# Altium PCB JacdacEc30Template20x20 80.PcbDoc
Units mm, origin at the board's own origin, x right, y up, seen from the top; angles counter-clockwise.
Board outline 28 x 25 mm, 2 copper layers (Top Layer, Bottom Layer), stack 1.525 mm thick; 8 components, 3 nets, 32 pads, 2 vias.
Unrouted connection lines stored in the file: 11.
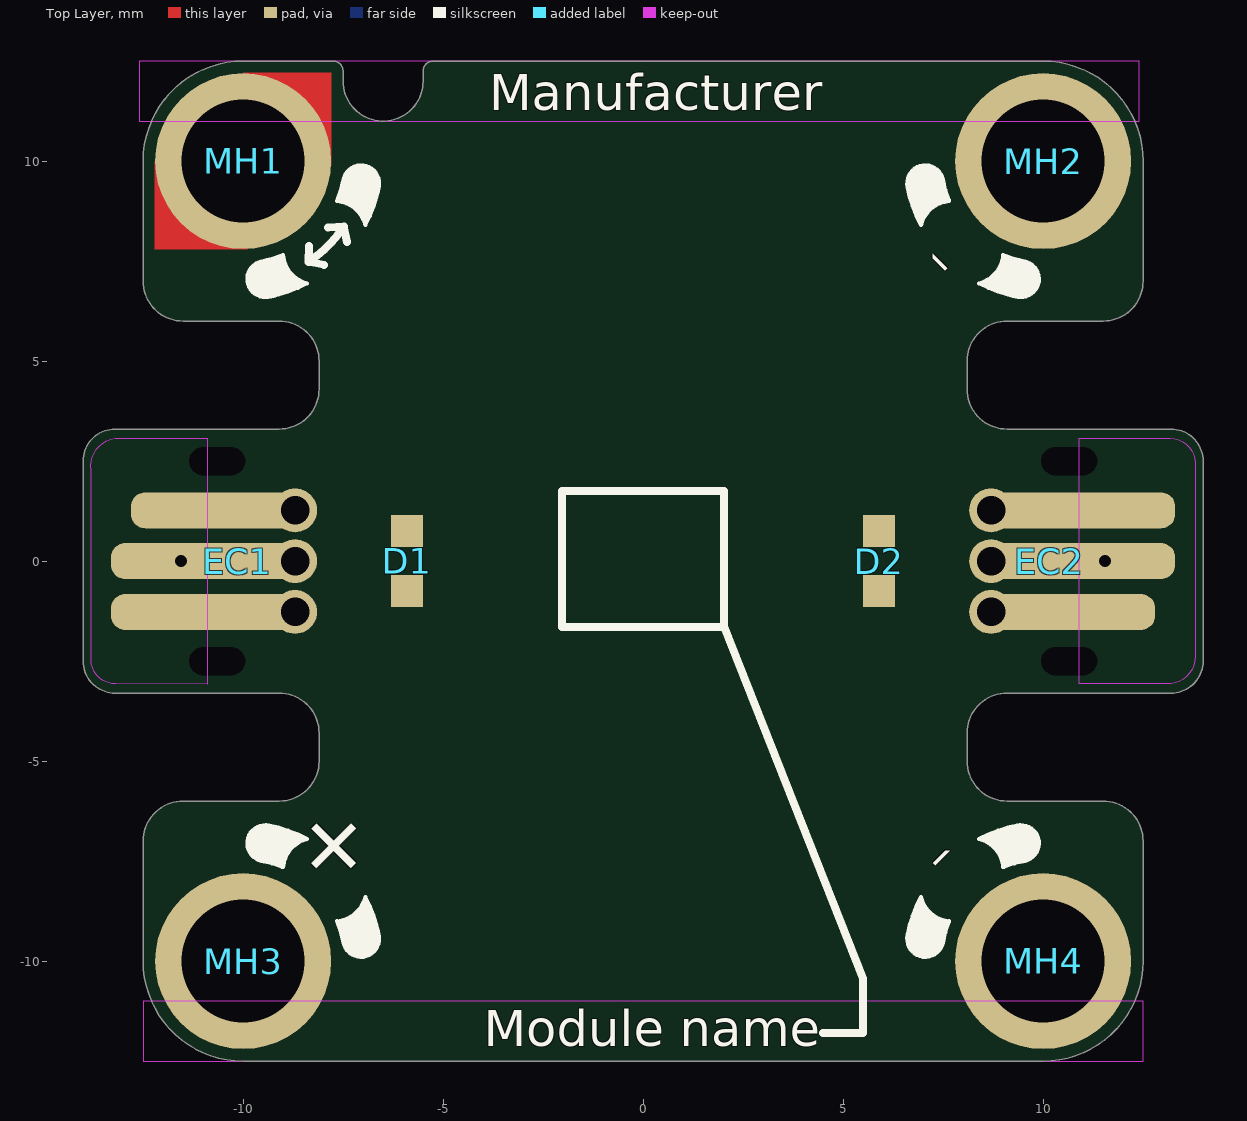
[diagram p0: Top Layer view]
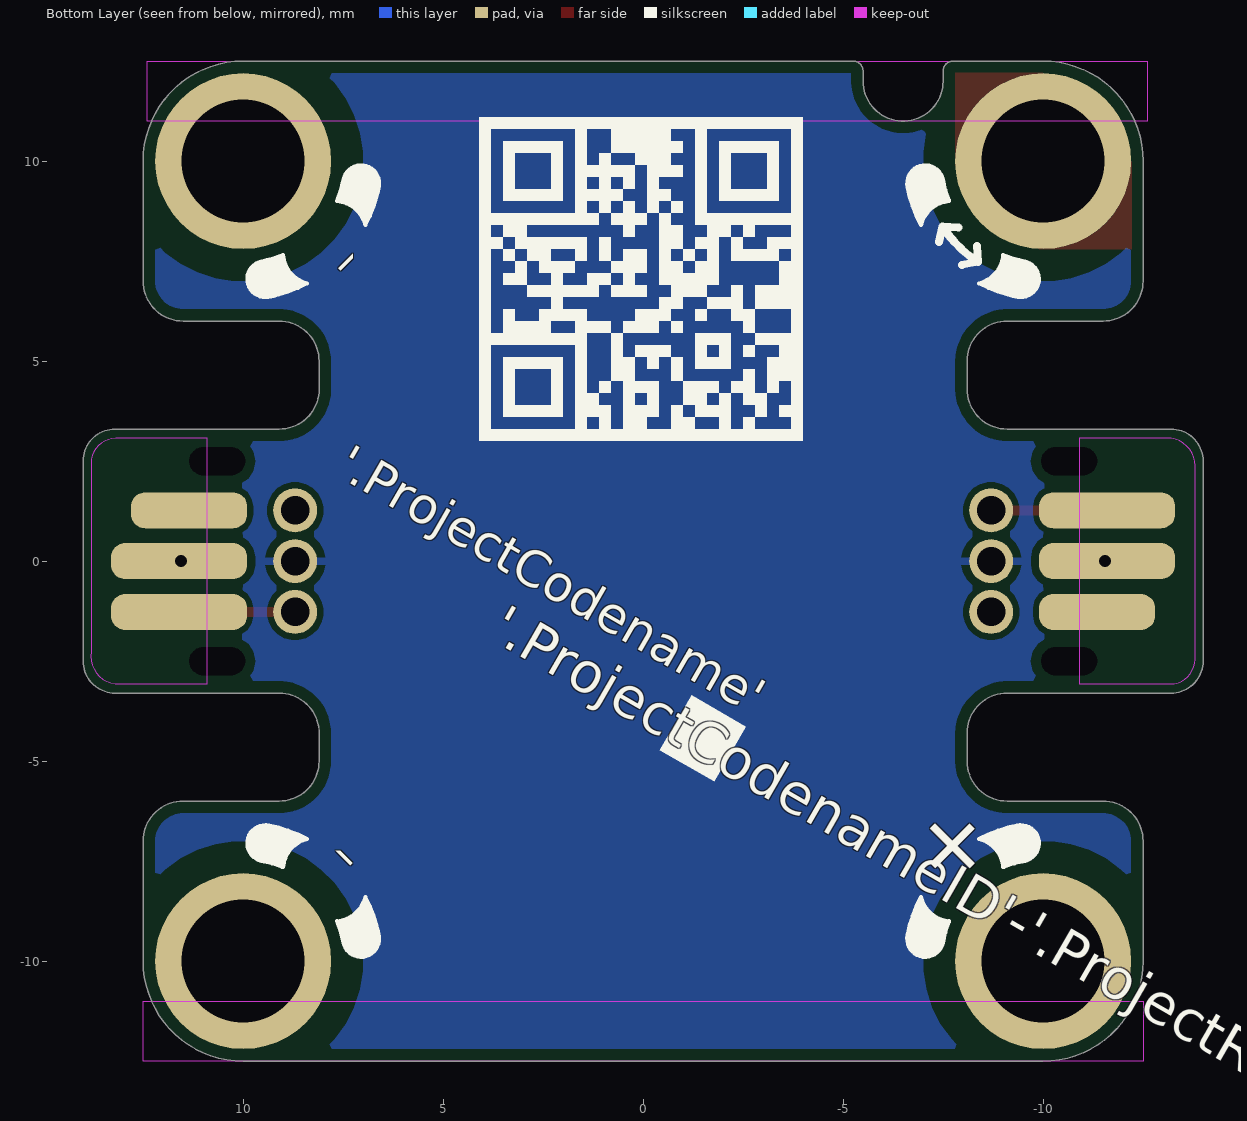
[diagram p1: Bottom Layer view, seen from below]

## Layer stack, top to bottom
Top Solder: solder mask 0.0102, Solder Resist, Dk 3.5
Top Layer: signal copper 0.0356
Dielectric 1: core 1.454, FR-4, Dk 4.2
Bottom Layer: signal copper 0.0356
Bottom Solder: solder mask 0.0102, Solder Resist, Dk 3.5

## Board outline
-12.5,-10 ccw(c-10,-10) -10,-12.5 10,-12.5 ccw(c10,-10) 12.5,-10 12.5,-7 ccw(c11.5,-7) 11.5,-6 9.1,-6 cw(c9.1,-5) 8.1,-5 8.1,-4.3 cw(c9.1,-4.3) 9.1,-3.3 13.2,-3.3 ccw(c13.2,-2.5) 14,-2.5 14,2.5 ccw(c13.2,2.5) 13.2,3.3 9.1,3.3 9.098,3.3 cw(c9.098,4.3) 8.098,4.3 8.1,4.3 8.1,5 cw(c9.1,5) 9.1,6 11.5,6 ccw(c11.5,7) 12.5,7 12.5,10 ccw(c10,10) 10,12.5 -5.25,12.5 ccw(c-5.25,12.25) -5.5,12.25 -5.5,12 cw(c-6.5,12) -7.5,12 -7.5,12.25 ccw(c-7.75,12.25) -7.75,12.5 -10,12.5 ccw(c-10,10) -12.5,10 -12.5,6.97 -12.5,7 ccw(c-11.5,7) -11.5,6 -9.1,6 cw(c-9.1,5) -8.1,5 -8.1,4.3 cw(c-9.1,4.3) -9.1,3.3 -13.2,3.3 ccw(c-13.2,2.5) -14,2.5 -14,2.47 -14,-2.47 -14,-2.5 ccw(c-13.2,-2.5) -13.2,-3.3 -9.1,-3.3 cw(c-9.1,-4.3) -8.1,-4.3 -8.1,-5 cw(c-9.1,-5) -9.1,-6 -11.5,-6 ccw(c-11.5,-7) -12.5,-7 -12.5,-6.97

## Design rules (kind name [scope] priority, off if disabled: settings)
AssemblyTestPointUsage [All] p1: valid=2
BoardOutlineClearance [not (HasFootprint('MOUSEBITE_CONNECTOR_3X2') or HasFootprint('MOUSEBITE_NOCONNECTOR_3'))] p1: gap=0.3 ignorepadtopadclearanceinfootprint=FALSE except(0: Arc-SplitContinuation Track-SplitContinuation SMDPad-SplitContinuation THPad-SplitContinuation Via-SplitContinuation Fill-SplitContinuation Poly-SplitContinuation Text-OutlineEdge Text-CavityEdge Text-CutoutEdge Text-SplitBarrior Text-SplitContinuation; 0.15: Region-OutlineEdge Region-CavityEdge Region-CutoutEdge Region-SplitBarrior Region-SplitContinuation)
Clearance "Clearance MH" [InComponent('MH1') OR InComponent('MH2') OR InComponent('MH3') OR InComponent('MH4')] p1: gap=0.15 ignorepadtopadclearanceinfootprint=FALSE except(0.254: Arc-Hole Track-Hole SMDPad-Hole THPad-Hole Via-Hole Fill-Hole Poly-Hole Region-Hole Text-Hole; 0.8: Arc-Fill Arc-Poly Arc-Region Track-Fill Track-Poly Track-Region SMDPad-Fill SMDPad-Poly SMDPad-Region THPad-Fill THPad-Poly THPad-Region Via-Fill Via-Poly Via-Region Fill-Fill Fill-Poly Fill-Region Poly-Poly Poly-Region Region-Region)
Clearance [All] p2: gap=0.15 ignorepadtopadclearanceinfootprint=FALSE except(0.254: Arc-Hole Track-Hole SMDPad-Hole THPad-Hole Via-Hole Fill-Hole Poly-Hole Region-Hole Text-Hole)
ComponentClearance [All] p1: gap=0.01 collisioncheckmode=3 verticalgap=0.2 showdistances=FALSE
DiffPairsRouting [All] p1: maxlimit=2 minlimit=0.15 mostfreqgap=0.15 toplayer_minwidth=0.15 toplayer_maxwidth=2 toplayer_prefwidth=0.15 bottomlayer_minwidth=0.15 bottomlayer_maxwidth=2 bottomlayer_prefwidth=0.15 substack1={CB9D278B-8BF5-444A-AAF4-837A2A9DF42D} toplayer_{cb9d278b-8bf5-444a-aaf4-837a2a9df42d}_minwidth=0.381 toplayer_{cb9d278b-8bf5-444a-aaf4-837a2a9df42d}_maxwidth=0.381 toplayer_{cb9d278b-8bf5-444a-aaf4-837a2a9df42d}_prefwidth=0.381 bottomlayer_{cb9d278b-8bf5-444a-aaf4-837a2a9df42d}_minwidth=0.381 bottomlayer_{cb9d278b-8bf5-444a-aaf4-837a2a9df42d}_maxwidth=0.381 bottomlayer_{cb9d278b-8bf5-444a-aaf4-837a2a9df42d}_prefwidth=0.381 substack2={826B8647-A721-4255-895A-19F9591B9CD1} toplayer_{826b8647-a721-4255-895a-19f9591b9cd1}_minwidth=0.381 toplayer_{826b8647-a721-4255-895a-19f9591b9cd1}_maxwidth=0.381 toplayer_{826b8647-a721-4255-895a-19f9591b9cd1}_prefwidth=0.381 bottomlayer_{826b8647-a721-4255-895a-19f9591b9cd1}_minwidth=0.381 bottomlayer_{826b8647-a721-4255-895a-19f9591b9cd1}_maxwidth=0.381 bottomlayer_{826b8647-a721-4255-895a-19f9591b9cd1}_prefwidth=0.381 substack3={E64FCAF4-1BC8-437D-B1E0-0E5F2DC0F59E} toplayer_{e64fcaf4-1bc8-437d-b1e0-0e5f2dc0f59e}_minwidth=0.381 toplayer_{e64fcaf4-1bc8-437d-b1e0-0e5f2dc0f59e}_maxwidth=0.381 toplayer_{e64fcaf4-1bc8-437d-b1e0-0e5f2dc0f59e}_prefwidth=0.381 bottomlayer_{e64fcaf4-1bc8-437d-b1e0-0e5f2dc0f59e}_minwidth=0.381 bottomlayer_{e64fcaf4-1bc8-437d-b1e0-0e5f2dc0f59e}_maxwidth=0.381 bottomlayer_{e64fcaf4-1bc8-437d-b1e0-0e5f2dc0f59e}_prefwidth=0.381 substack4={E61CE66C-507C-4E1E-8E83-C905434AFC1C} toplayer_{e61ce66c-507c-4e1e-8e83-c905434afc1c}_minwidth=0.381 toplayer_{e61ce66c-507c-4e1e-8e83-c905434afc1c}_maxwidth=0.381 toplayer_{e61ce66c-507c-4e1e-8e83-c905434afc1c}_prefwidth=0.381 bottomlayer_{e61ce66c-507c-4e1e-8e83-c905434afc1c}_minwidth=0.381 bottomlayer_{e61ce66c-507c-4e1e-8e83-c905434afc1c}_maxwidth=0.381 bottomlayer_{e61ce66c-507c-4e1e-8e83-c905434afc1c}_prefwidth=0.381 maxuncoupledlength=25
FabricationTestPointUsage [All] p1: valid=2 allowmultiple=FALSE
HoleSize [All] p1: absolutevalues=TRUE maxlimit=5 minlimit=0.3 maxpercent=80.000 minpercent=20.000
HoleToHoleClearance [IsPad and not (HasFootprint('MOUSEBITE_CONNECTOR_3X2') or HasFootprint('MOUSEBITE_NOCONNECTOR_3')) vs IsPad and not  (HasFootprint('MOUSEBITE_CONNECTOR_3X2') or HasFootprint('MOUSEBITE_NOCONNECTOR_3'))] p1: gap=0.5 allowstackedmicrovias=TRUE
MinimumAnnularRing [All] p1: minimumring=0.15
MinimumSolderMaskSliver [All] p1: minsoldermaskwidth=0.005
PlaneClearance [All] p1: clearance=0.3
PlaneConnect [All] p1: planeconnectstyle=Relief reliefexpansion=0.5 reliefentries=4 reliefconductorwidth=0.2 reliefairgap=0.3
PolygonConnect "PolygonConnect MH" [InComponent('MH1') OR InComponent('MH2') OR InComponent('MH3') OR InComponent('MH4')] p1: connectstyle=Relief reliefconductorwidth=0.5 reliefentries=4 polygonreliefangle="45 Angle" airgapwidth=0.8
PolygonConnect [All] p2: connectstyle=Relief reliefconductorwidth=0.2 reliefentries=4 polygonreliefangle="90 Angle" airgapwidth=0.2
RoutingVias [All] p1: holewidth=0.3 width=0.6 viastyle="Through Hole" minholewidth=0.3 minwidth=0.6 maxholewidth=0.3 maxwidth=0.8
SilkToSilkClearance [All] p1: silktosilkclearance=0.001
SilkToSolderMaskClearance [IsPad] p1: minsilkscreentomaskgap=0.05 clearancetoexposedcopper=TRUE
SolderMaskExpansion [All] p1: expansion=0.075 istentingtop=FALSE
UnRoutedNet [All] p1: checkbadconnections=TRUE
Width [All] p1: maxlimit=2 minlimit=0.15 preferedwidth=0.15 substack1={CB9D278B-8BF5-444A-AAF4-837A2A9DF42D} substack2={826B8647-A721-4255-895A-19F9591B9CD1} substack3={E64FCAF4-1BC8-437D-B1E0-0E5F2DC0F59E} substack4={E61CE66C-507C-4E1E-8E83-C905434AFC1C} minimp=50.000000 maximp=50.000000 favimp=50.000000
18 further rules are at their usual default settings.

## Components (designator, comment, footprint, x,y, rotation, side; value= is the part's Value field where it differs from the comment)
D1 "Everlight Elec'''" "0603 Orange" -5.9,0 r270 top
D2 "Everlight Elec'''" "0603 Orange" 5.9,0 r270 top
EC1 "Jacdac edge connector" JACDAC_EDGE_CONNECTOR_NO_TRACES -8.15,0 r90 top (schematic designator J1)
EC2 "Jacdac edge connector" JACDAC_EDGE_CONNECTOR_NO_TRACES 8.15,0 r270 top (schematic designator J2)
MH1 "MH_6.5MMK_4.5MMC_3.0MMD_PTH" MH_6.5MMK_4.5MMC_3.0MMD_PTH -10,10 r90 top
MH2 "MH_6.5MMK_4.5MMC_3.0MMD_PTH" MH_6.5MMK_4.5MMC_3.0MMD_PTH 10,10 r90 top (schematic designator MH2a)
MH3 "MH_6.5MMK_4.5MMC_3.0MMD_PTH" MH_6.5MMK_4.5MMC_3.0MMD_PTH -10,-10 r90 top
MH4 "MH_6.5MMK_4.5MMC_3.0MMD_PTH" MH_6.5MMK_4.5MMC_3.0MMD_PTH 10,-10 r90 top (schematic designator MH2b)

## Footprints (in the part's own frame and the unit in brackets; to place one, negate y for a bottom-side part, rotate by r counter-clockwise, add the part's x,y. Pads: shape width x height; smd on the part's side, far side on the other; paste and mask are expansions set on the pad)
"0603 Orange" [mm]
  rect 0.8x0.8 smd paste-0.05: 1(-0.75,0) 2(0.75,0)
  body extent -0.79,-0.4 0.81,0.4, height 0.4
JACDAC_EDGE_CONNECTOR_NO_TRACES [mm] "Jacdac 3 pin connector with no traces"
  rrect78% 0.9x2.9 smd far side paste-1 mask+0: 1(-1.27,3.2)
  rrect78% 0.9x4.3 smd paste-1 mask+0: 1(1.27,2.5)
  round 1.1 hole 0.71 paste-0.254 mask+0: 1(1.27,0.55) 2(0,0.55) 3(-1.27,0.55)
  rrect78% 0.9x3.4 smd far side paste-1 mask+0: 2(0,3.45) 2(0,3.45) 3(1.27,3.45)
  rrect78% 0.9x4.8 smd paste-1 mask+0: 2(0,2.75) 3(-1.27,2.75)
  round 0 hole 0.7 slot 1.4 at 90 deg unplated: ""(-2.5,2.5) ""(2.5,2.5)
  Top Layer keep-out region: -3.075,2.75 -3.07,5.033 -2.987,5.341 -2.761,5.567 -2.453,5.65 -2.453,5.65 2.27,5.65 2.545,5.635 2.794,5.516 2.978,5.31 3.07,5.05 3.07,5.05 3.07,2.75
  Bottom Layer lines w0.2: -1.27,0.85 -1.126,0.85
  Bottom Layer keep-out region: -3.07,2.75 -3.07,5.033 -3.023,5.269 -2.889,5.469 -2.689,5.603 -2.453,5.65 -2.453,5.65 2.27,5.65 2.546,5.635 2.794,5.516 2.978,5.31 3.07,5.05 3.07,5.05 3.07,2.75
MH_6.5MMK_4.5MMC_3.0MMD_PTH [mm] "Jacdac mounting hole 6.5mm clearance, 4.5 annualar ring and 3.0mm PTH"
  round 4.4 hole 3.08 mask+0.3: 1(0,0)

## Part data
D1 D2: library part 19-217/S2C-AQ1R1B/3T, "LED ORANGE DIFFUSED 0603 SMD", Case Code (Imperial)=0603, Color=Orange, Manufacturer="Everlight Elec", Supplier 1 Part Number=C146215, Case/Package=0603, Colour=Orange, ComponentLink1Description="Online datasheet", ComponentLink1URL=https://datasheet.lcsc.com/lcsc/1912171731_Everlight-Elec-19-217-S2C-AQ1R1B-3T_C146215.pdf, Manufacturer Part Number=19-217/S2C-AQ1R1B/3T, Mount="Surface Mount", Supplier 1=LCSC
EC1 EC2: "3 pin Jacdac edge connector 1.27mm pitch", Manufacturer Part Number=JACDAC_EDGE_CONNECTOR, Checked By=?, ComponentLink1Description="Yuliang JACDAC cable connector drawing online", ComponentLink1URL=https://github.com/microsoft/jacdac-mdk/blob/main/connector/JACDAC-Connector-by-Yuliang-2020-11-28.pdf, ComponentLink2Description="JACDAC PCB edge connector spec onlin", ComponentLink2URL=https://github.com/microsoft/jacdac-mdk/blob/main/connector/JACDAC_PCB_Edge_Connector_Drawing_JD-PEC-01_rev_01.pdf, Created By="D. Gakure", PCB Type="1.6mm FR4"
MH1 MH2 MH3 MH4: "Mounting Hole 6.5mm keepout, 4.5mm annualar ring and 3.0mm Drill PTH"

## Via types
v1: diameter 0.6, hole 0.3, Top Layer to Bottom Layer, tented both sides, 2 vias

## Nets (pads, with @x,y where several pads share a name; then routed paths per layer and width w, separated by ;. In a path a pad name is that pad's centre, name@x,y a point inside that pad or via, vN(x,y) a via of type N, cw(c..) or ccw(c..) an arc to the next point about the centre after c; other vN are vias at no path point)
GND: EC1.2 EC2.2 MH2.1 MH4.1
  other v1: -11.55,0 11.55,0
JD_DATA: EC1.1 EC2.1 MH1.1 | length 3.7
  Top Layer w0.25: EC1.1@-10.65,1.27 EC1.1@-8.7,1.27 ; EC2.1@8.95,-1.27 EC2.1@10.65,-1.27
JD_PWR: EC1.3 EC2.3 MH3.1
pads on no net: D1.1 D1.2 D2.1 D2.2 EC1. EC2.

## Polygon pours and split planes (outlines as drawn)
no net on Bottom Assy "NONET_L-01_P-001" (hatched 45Degree grid 0.15 track 0.01): 12.5,-8.342 ccw(c10,-10) 8.342,-12.5 10,-12.5 ccw(c10,-10) 12.5,-10
no net on Bottom Assy "NONET_L-01_P-001" (hatched 45Degree grid 0.15 track 0.01): -12.5,-8.342 cw(c-10,-10) -8.342,-12.5 -10,-12.5 cw(c-10,-10) -12.5,-10
no net on Bottom Assy "NONET_L-01_P-001" (hatched 45Degree grid 0.15 track 0.01): -9.3,-2.868 -13.2,-2.868 cw(c-13.2,-2.468) -13.6,-2.468 -13.6,-2.466 -13.6,2.477 -13.6,2.474 cw(c-13.2,2.474) -13.2,2.874 -13.198,2.874 -9.3,2.874
no net on Bottom Assy "NONET_L-01_P-001" (hatched 45Degree grid 0.15 track 0.01): -12.5,8.342 ccw(c-10,10) -8.342,12.5 -10,12.5 ccw(c-10,10) -12.5,10
no net on Bottom Assy "NONET_L-01_P-001" (hatched 45Degree grid 0.15 track 0.01): 12.5,8.342 cw(c10,10) 8.342,12.5 10,12.5 cw(c10,10) 12.5,10
no net on Bottom Assy "NONET_L-01_P-001" (hatched 45Degree grid 0.15 track 0.01): 9.3,-2.88 13.2,-2.88 ccw(c13.2,-2.48) 13.6,-2.48 13.6,-2.478 13.6,2.465 13.6,2.462 ccw(c13.2,2.462) 13.2,2.862 13.198,2.862 9.3,2.862
no net on Bottom Assy "NONET_L-01_P-001" (solid): -12.949,-0.82 ccw(c-12.949,-1.171) -13.3,-1.171 -13.3,-1.369 ccw(c-12.949,-1.369) -12.949,-1.72 -9.016,-1.72 ccw(c-8.7,-1.27) -9.016,-0.82
no net on Bottom Assy "NONET_L-01_P-001" (solid): -12.449,1.72 ccw(c-12.449,1.369) -12.8,1.369 -12.8,1.171 ccw(c-12.449,1.171) -12.449,0.82 -9.016,0.82 ccw(c-8.7,1.27) -9.016,1.72
no net on Bottom Assy "NONET_L-01_P-001" (solid): 12.449,-1.72 ccw(c12.449,-1.369) 12.8,-1.369 12.8,-1.171 ccw(c12.449,-1.171) 12.449,-0.82 9.016,-0.82 ccw(c8.7,-1.27) 9.016,-1.72
no net on Bottom Assy "NONET_L-01_P-001" (solid): 12.949,-0.45 ccw(c12.949,-0.099) 13.3,-0.099 13.3,0.099 ccw(c12.949,0.099) 12.949,0.45 9.016,0.45 ccw(c8.7,0) 9.016,-0.45
no net on Bottom Assy "NONET_L-01_P-001" (solid): 12.949,0.82 ccw(c12.949,1.171) 13.3,1.171 13.3,1.369 ccw(c12.949,1.369) 12.949,1.72 9.016,1.72 ccw(c8.7,1.27) 9.016,0.82
no net on Bottom Assy "NONET_L-01_P-001" (solid): -12.949,0.45 ccw(c-12.949,0.099) -13.3,0.099 -13.3,-0.099 ccw(c-12.949,-0.099) -12.949,-0.45 -9.016,-0.45 ccw(c-8.7,0) -9.016,0.45
no net on Bottom Assy "NONET_L-01_P-001" (solid): 10,-12.2 ccw(c10,-10) 12.2,-10 ccw(c10,-10) 10,-7.8 ccw(c10,-10) 7.8,-10 ccw(c10,-10)
no net on Bottom Assy "NONET_L-01_P-001" (solid): 10,7.8 ccw(c10,10) 12.2,10 ccw(c10,10) 10,12.2 ccw(c10,10) 7.8,10 ccw(c10,10)
no net on Bottom Assy "NONET_L-01_P-001" (solid): -10,7.8 ccw(c-10,10) -7.8,10 ccw(c-10,10) -10,12.2 ccw(c-10,10) -12.2,10 ccw(c-10,10)
no net on Bottom Assy "NONET_L-01_P-001" (solid): -10,-12.2 ccw(c-10,-10) -7.8,-10 ccw(c-10,-10) -10,-7.8 ccw(c-10,-10) -12.2,-10 ccw(c-10,-10)
no net on Bottom Assy "NONET_L-01_P-001" (solid): -9.9,7.8 -7.8,9.9 -7.8,12.215 -9.985,12.215 -12.215,9.985 -12.215,7.8
no net on Bottom Assy "NONET_L-01_P-001" (hatched 45Degree grid 0.3 track 0.01): -12.513,-10 -12.513,-7.018 -12.505,-7 cw(c-11.5,-7) -11.5,-5.995 -9.1,-5.995 ccw(c-9.1,-5) -8.105,-5 -8.105,-4.301 -8.105,-4.3 ccw(c-9.1,-4.3) -9.1,-3.305 -13.2,-3.305 cw(c-13.2,-2.5) -14.005,-2.5 -14.005,2.5 cw(c-13.2,2.5) -13.201,3.305 -13.2,3.305 -9.1,3.305 ccw(c-9.1,4.3) -8.105,4.3 -8.105,4.301 -8.105,5 ccw(c-9.1,5) -9.1,5.995 -11.5,5.995 cw(c-11.5,7) -12.505,6.991 -12.513,7.003 -12.513,10 cw(c-10,10) -10.002,12.513 -10,12.513 -7.729,12.513 -7.724,12.512 cw(c-7.75,12.25) -7.487,12.25 -7.487,12 -7.487,11.999 ccw(c-6.5,12) -6.657,11.025 -6.638,11.018 cw(c-10,10) -6.487,10 cw(c-10,10) -6.987,8.194 -6.987,-8.194 cw(c-10,-10) -6.487,-10 cw(c-10,-10) -6.629,-10.987 6.629,-10.987 cw(c10,-10) 6.987,-8.194 6.987,8.194 cw(c10,10) 6.629,10.987 -6.5,10.987 -6.497,11.013 ccw(c-6.5,12) -5.513,11.999 -5.513,12 -5.513,12.25 -5.513,12.251 cw(c-5.25,12.25) -5.25,12.513 -5.249,12.513 10,12.513 10.001,12.513 cw(c10,10) 12.513,10 12.513,6.966 12.504,6.954 cw(c11.5,7) 11.5,5.995 9.1,5.995 ccw(c9.1,5) 8.105,5 8.105,4.301 8.105,4.3 ccw(c9.1,4.3) 9.1,3.305 13.2,3.305 13.201,3.305 cw(c13.2,2.5) 14.005,2.5 14.005,-2.5 cw(c13.2,-2.5) 13.2,-3.305 9.1,-3.305 ccw(c9.1,-4.3) 8.105,-4.3 8.105,-4.301 8.105,-5 ccw(c9.1,-5) 9.1,-5.995 11.5,-5.995 cw(c11.5,-7) 12.505,-6.962 12.513,-6.974 12.513,-10 cw(c10,-10) 10.001,-12.513 10,-12.513 -7.729,-12.513 -7.73,-12.513 -10,-12.513 -10.002,-12.513 cw(c-10,-10)
no net on Bottom Assy "NONET_L-01_P-001" (hatched Horizontal grid 0.07 track 0.15): -12.5,-10 ccw(c-10,-10) -10,-12.5 10,-12.5 ccw(c10,-10) 12.5,-10 12.5,-7 ccw(c11.5,-7) 11.5,-6 9.1,-6 cw(c9.1,-5) 8.1,-5 8.1,-4.3 cw(c9.1,-4.3) 9.1,-3.3 13.2,-3.3 ccw(c13.2,-2.5) 14,-2.5 14,2.5 ccw(c13.2,2.5) 13.2,3.3 9.1,3.3 9.098,3.3 cw(c9.098,4.3) 8.098,4.3 8.1,4.3 8.1,5 cw(c9.1,5) 9.1,6 11.5,6 ccw(c11.5,7) 12.5,7 12.5,10 ccw(c10,10) 10,12.5 -5.25,12.5 ccw(c-5.25,12.25) -5.5,12.25 -5.5,12 cw(c-6.5,12) -7.5,12 -7.5,12.25 ccw(c-7.75,12.25) -7.75,12.5 -10,12.5 ccw(c-10,10) -12.5,10 -12.5,7 ccw(c-11.5,7) -11.5,6 -9.1,6 cw(c-9.1,5) -8.1,5 -8.1,4.3 -8.098,4.3 cw(c-9.098,4.3) -9.098,3.3 -9.1,3.3 -13.2,3.3 ccw(c-13.2,2.5) -14,2.5 -14,-2.5 ccw(c-13.2,-2.5) -13.2,-3.3 -9.1,-3.3 cw(c-9.1,-4.3) -8.1,-4.3 -8.1,-5 cw(c-9.1,-5) -9.1,-6 -11.5,-6 ccw(c-11.5,-7) -12.5,-7 -12.5,-6.97
no net on Fabrication notes "NONET_L-01_P-001" (hatched 45Degree grid 0.6 track 0.01): 14.5,-7 8,-7 7.988,-7 7.989,7.01 8,7 14.5,7 14.489,7.01
no net on Fabrication notes "NONET_L-01_P-001" (hatched 45Degree grid 0.6 track 0.01): -14.5,-7 -8,-7 -7.988,-7 -7.989,7.01 -8,7 -14.5,7 -14.489,7.01
GND on Bottom Layer "NONET_L-01_P-001" (solid, pour order 1): -12.5,-10 ccw(c-10,-10) -10,-12.5 10,-12.5 ccw(c10,-10) 12.5,-10 12.5,-7 ccw(c11.5,-7) 11.5,-6 9.1,-6 cw(c9.1,-5) 8.1,-5 8.1,-4.3 cw(c9.1,-4.3) 9.1,-3.3 13.2,-3.3 ccw(c13.2,-2.5) 14,-2.5 14,2.5 ccw(c13.2,2.5) 13.2,3.3 9.1,3.3 9.098,3.3 cw(c9.098,4.3) 8.098,4.3 8.1,4.3 8.1,5 cw(c9.1,5) 9.1,6 11.5,6 ccw(c11.5,7) 12.5,7 12.5,10 ccw(c10,10) 10,12.5 -5.25,12.5 ccw(c-5.25,12.25) -5.5,12.25 -5.5,12 cw(c-6.5,12) -7.5,12 -7.5,12.25 ccw(c-7.75,12.25) -7.75,12.5 -10,12.5 ccw(c-10,10) -12.5,10 -12.5,6.97 -12.5,7 ccw(c-11.5,7) -11.5,6 -9.1,6 cw(c-9.1,5) -8.1,5 -8.1,4.3 -8.098,4.3 cw(c-9.098,4.3) -9.098,3.3 -9.1,3.3 -13.2,3.3 ccw(c-13.2,2.5) -14,2.5 -14,2.47 -14,-2.47 -14,-2.5 ccw(c-13.2,-2.5) -13.2,-3.3 -9.1,-3.3 cw(c-9.1,-4.3) -8.1,-4.3 -8.1,-5 cw(c-9.1,-5) -9.1,-6 -11.5,-6 ccw(c-11.5,-7) -12.5,-7 -12.5,-6.97

## Keep-outs
Keep-Out Layer:
  region: 12.5,-12.5 12.5,-11 -12.5,-11 -12.5,-12.5
  region: 12.4,11 12.4,12.5 -12.6,12.5 -12.6,11

## Other copper
Top Layer:
  region net JD_DATA: -12.215,7.8 -9.9,7.8 -7.8,9.9 -7.8,12.215 -9.985,12.215 -12.215,9.985
  text "Top Layer" at 15.701,-4.75 h1.7
Bottom Layer:
  pour cut-out: 10,7.5 ccw(c10,10) 12.5,10 ccw(c10,10) 10,12.5 ccw(c10,10) 7.5,10 ccw(c10,10)
  pour cut-out: 10,-12.5 ccw(c10,-10) 12.5,-10 ccw(c10,-10) 10,-7.5 ccw(c10,-10) 7.5,-10 ccw(c10,-10)
  pour cut-out: -10,7.5 ccw(c-10,10) -7.5,10 ccw(c-10,10) -10,12.5 ccw(c-10,10) -12.5,10 ccw(c-10,10)
  pour cut-out: -10,-12.5 ccw(c-10,-10) -7.5,-10 ccw(c-10,-10) -10,-7.5 ccw(c-10,-10) -12.5,-10 ccw(c-10,-10)
  text "Bottom Layer" at 15.7,-6.25 h1.7

## Silkscreen, mask and mechanical layers (free items; w line width, h text height)
Top Overlay:
  lines w0.1: -9.374,-6.607 cw(c-10,-10) -8.399,-6.944 ccw(c-8.206,-7.72) -9.003,-7.653 ; -9.374,6.607 ccw(c-10,10) -8.399,6.944 cw(c-8.206,7.72) -9.003,7.653 ; -9.352,-6.612 ccw(c-9.446,-7.052) -9.539,-7.492 cw(c-10,-10) -9.027,-7.643 ; -9.352,6.612 cw(c-9.446,7.052) -9.539,7.492 ccw(c-10,10) -9.027,7.643 ; -7.653,-9.003 ccw(c-7.72,-8.206) -6.944,-8.399 cw(c-10,-10) -6.607,-9.374 ; -7.653,9.003 cw(c-7.72,8.206) -6.944,8.399 ccw(c-10,10) -6.607,9.374 ; -7.643,-9.027 cw(c-10,-10) -7.492,-9.539 ccw(c-7.052,-9.446) -6.612,-9.352 ; -7.643,9.027 ccw(c-10,10) -7.492,9.539 cw(c-7.052,9.446) -6.612,9.352 ; 6.607,-9.374 cw(c10,-10) 6.944,-8.399 ccw(c7.72,-8.206) 7.653,-9.003 ; 6.607,9.374 ccw(c10,10) 6.944,8.399 cw(c7.72,8.206) 7.653,9.003 ; 6.612,-9.352 ccw(c7.052,-9.446) 7.492,-9.539 cw(c10,-10) 7.643,-9.027 ; 6.612,9.352 cw(c7.052,9.446) 7.492,9.539 ccw(c10,10) 7.643,9.027 ; 9.003,-7.653 ccw(c8.206,-7.72) 8.399,-6.944 cw(c10,-10) 9.374,-6.607 ; 9.003,7.653 cw(c8.206,7.72) 8.399,6.944 ccw(c10,10) 9.374,6.607 ; 9.027,-7.643 cw(c10,-10) 9.539,-7.492 ccw(c9.446,-7.052) 9.352,-6.612 ; 9.027,7.643 ccw(c10,10) 9.539,7.492 cw(c9.446,7.052) 9.352,6.612
  lines w0.2: -8.352,7.884 -8.366,7.484 ; -7.973,7.408 -8.366,7.484 ; -7.883,8.345 -7.484,8.366 ; -7.401,7.975 -7.484,8.366 ; 4.5,-11.8 5.5,-11.8 5.5,-10.45 2.023,-1.65 ; -8.366,7.484 ccw(c-10,10) -7.484,8.366 ; 2.023,-1.65 -2.023,-1.65 -2.023,1.75 2.023,1.75 2.023,-1.65
  lines w0.33: -9.1,-7.445 cw(c-8.759,-7.302) -8.685,-6.94 ; -9.1,7.445 ccw(c-8.759,7.302) -8.685,6.94 ; -7.445,-9.1 ccw(c-7.302,-8.759) -6.94,-8.685 ; -7.445,9.1 cw(c-7.302,8.759) -6.94,8.685 ; 6.94,-8.685 ccw(c7.302,-8.759) 7.445,-9.1 ; 6.94,8.685 cw(c7.302,8.759) 7.445,9.1 ; 8.685,-6.94 cw(c8.759,-7.302) 9.101,-7.445 ; 8.685,6.94 ccw(c8.759,7.302) 9.1,7.445
  lines w1: -9.43,-7.055 cw(c-10,-10) -9.285,-7.086 ; -9.43,7.055 ccw(c-10,10) -9.285,7.086 ; -7.086,-9.285 cw(c-10,-10) -7.055,-9.43 ; -7.086,9.285 ccw(c-10,10) -7.055,9.43 ; 7.055,-9.43 cw(c10,-10) 7.086,-9.285 ; 7.055,9.43 ccw(c10,10) 7.086,9.285 ; 9.285,-7.086 cw(c10,-10) 9.43,-7.055 ; 9.285,7.086 ccw(c10,10) 9.43,7.055
  text "Manufacturer" at -3.848,11.27 h0.9
  text "-" at 8.643,8.146 h3.5 r135
  text "-" at 8.146,-8.643 h3.5 r45
  text "+" at -7.95,-8.67 h2.8 r315
  text "Top Overlay" at 15.701,-10.475 h1.7
  text "Module name" at -3.981,-12.13 h0.9
Bottom Overlay:
  drawing of 245 lines, arcs and shapes, not listed
  text "-" at 8.643,8.146 h3.5 r135
  text "'.ProjectCodename'" at 7.724,2.171 h0.9 r30
  text "'.ProjectCodenameID'-'.ProjectRevision'" at 3.889,-1.912 h1 r30
  text "Bottom Overlay" at 24.3,-4.775 h1.7
  text "-" at 8.146,-8.643 h3.5 r45
  text "+" at -7.95,-8.67 h2.8 r315
Top Paste:
  text "Top Paste" at 24.301,-6.182 h1.7
Bottom Paste:
  text "Bottom Paste" at 24.3,-7.66 h1.7
Top Solder:
  text "Top Solder (resist)" at 24.301,-8.982 h1.7
Bottom Solder:
  text "Bottom Solder (resist)" at 24.3,-10.473 h1.7
Drill Guide:
  text "Drill Guide" at 37.725,-8.985 h1.7
Dimension:
  circle w0.1: c10,-10 r2.2
  circle w0.1: c-10,-10 r3.5
  text "Dimension" at 37.725,-7.685 h1.7
Fabrication notes:
  lines w0.01: -14.5,-7 -8,-7 ; -14.5,7 -8,7 ; -14.489,7.01 -14.488,-7 ; -7.989,7.01 -7.988,-7 ; 7.988,-7 7.989,7.01 ; 8,-7 14.5,-7 ; 8,7 14.5,7 ; 14.488,-7 14.489,7.01
  lines w0.2: -16.25,-0.2 -12.4,-2.5 -10.65,-2.5 ; -16.25,0.2 -12.4,2.5 -10.65,2.5 ; -16.25,6 -14.5,6 ; 10.65,-2.5 12.4,-2.5 16.25,-0.2 ; 10.65,2.5 12.4,2.5 16.25,0.2 ; 14.5,6 16.25,6
  text "no board edge pips/ / rat's teeth/mouse bites  / in this region - make  / sure board edge is clean" at -32.397,4 h1.7
  text "no board edge pips/ / rat's teeth/mouse bites  / in this region - make  / sure board edge is clean" at 16.6,4 h1.7
  text "non-plated slots x2" at -27.299,-0.407 h1.7
  text "non-plated slots x2" at 16.679,-0.407 h1.7
  text "Fabrication Notes" at 37.725,-4.785 h1.7
Top Component Center:
  lines w0.2: -6.4,0 -5.4,0 ; -5.9,-0.5 -5.9,0.5 ; 5.4,0 6.4,0 ; 5.9,-0.5 5.9,0.5
Alignment:
  circle w0.1: c10,10 r2.5
Mechanical 9:
  lines w0.01: 25.77,-8.595 ccw(c23.445,-8.55) 25.77,-8.55
Board Outline:
  lines w0.2: -14,-2.5 ccw(c-13.2,-2.5) -13.2,-3.3 -9.1,-3.3 ; -14,-2.47 -14,2.47 ; -14,2.5 cw(c-13.2,2.5) -13.2,3.3 -9.1,3.3 ; -12.5,-7 cw(c-11.5,-7) -11.5,-6 -9.1,-6 ccw(c-9.1,-5) -8.1,-5 -8.1,-4.3 ccw(c-9.1,-4.3) -9.1,-3.3 ; -12.5,-6.97 -12.5,-10 ccw(c-10,-10) -10,-12.5 10,-12.5 ccw(c10,-10) 12.5,-10 12.5,-7 ccw(c11.5,-7) 11.5,-6 9.1,-6 cw(c9.1,-5) 8.1,-5 8.1,-4.3 cw(c9.1,-4.3) 9.1,-3.3 13.2,-3.3 ; -12.5,6.97 -12.5,10 cw(c-10,10) -10,12.5 -7.75,12.5 cw(c-7.75,12.25) -7.5,12.25 -7.5,12 ccw(c-6.5,12) -5.5,12 -5.5,12.25 cw(c-5.25,12.25) -5.25,12.5 10,12.5 cw(c10,10) 12.5,10 12.5,7 cw(c11.5,7) 11.5,6 9.1,6 ccw(c9.1,5) 8.1,5 8.1,4.3 ; -12.5,7 ccw(c-11.5,7) -11.5,6 -9.1,6 cw(c-9.1,5) -8.1,5 -8.1,4.3 ; -9.098,3.3 ccw(c-9.098,4.3) -8.098,4.3 ; 8.098,4.3 ccw(c9.098,4.3) 9.098,3.3 ; 9.1,3.3 13.2,3.3 cw(c13.2,2.5) 14,2.5 14,-2.5 cw(c13.2,-2.5) 13.2,-3.3
  text "Board Outline" at 37.725,-6.185 h1.7
Top Assy:
  text "Top Assy" at 15.701,-7.575 h1.7
Bottom Assy:
  text "Bottom Assy" at 15.7,-8.975 h1.7
Drill Drawing:
  text "Drill Drawing" at 24.3,-11.875 h1.7
Assembly Notes:
  lines w0.05: -12.504,-7.031 -7.15,-7.031 -7.15,7.031 -12.504,7.031 -12.504,-7.031
Top Dwg:
  circle w0.05: c10,-10 r2.2
  circle w0.025: c10,10 r1.515
  circle w0.025: c10,10 r2.2
  circle w0.025: c10,10 r2.5
  circle w0.025: c-10,-10 r2.5
  circle w0.025: c10,-10 r2.5
  pour cut-out: 10,8.485 ccw(c10,10) 11.515,10 ccw(c10,10) 10,11.515 ccw(c10,10) 8.485,10 ccw(c10,10)
  pour cut-out: -10,8.485 ccw(c-10,10) -8.485,10 ccw(c-10,10) -10,11.515 ccw(c-10,10) -11.515,10 ccw(c-10,10)
  pour cut-out: -10,-11.515 ccw(c-10,-10) -8.485,-10 ccw(c-10,-10) -10,-8.485 ccw(c-10,-10) -11.515,-10 ccw(c-10,-10)
  pour cut-out: 10,-11.515 ccw(c10,-10) 11.515,-10 ccw(c10,-10) 10,-8.485 ccw(c10,-10) 8.485,-10 ccw(c10,-10)
  lines w0.01: -12.5,-8.342 -12.5,-7 cw(c-11.5,-7) -11.5,-6 -9.1,-6 ccw(c-9.1,-5) -8.1,-5 -8.1,-4.3 ccw(c-9.1,-4.3) -9.1,-3.3 -13.2,-3.3 cw(c-13.2,-2.5) -14,-2.5 -14,2.5 cw(c-13.2,2.5) -13.2,3.3 -9.1,3.3 ccw(c-9.1,4.3) -8.1,4.3 -8.1,5 ccw(c-9.1,5) -9.1,6 -11.5,6 cw(c-11.5,7) -12.5,7 -12.5,7.5 ; 12.5,-8.342 12.5,-7 ccw(c11.5,-7) 11.5,-6 9.1,-6 cw(c9.1,-5) 8.1,-5 8.1,-4.3 cw(c9.1,-4.3) 9.1,-3.3 13.2,-3.3 ccw(c13.2,-2.5) 14,-2.5 14,2.5 ccw(c13.2,2.5) 13.2,3.3 9.1,3.3 cw(c9.1,4.3) 8.1,4.3 8.1,5 cw(c9.1,5) 9.1,6 11.5,6 ccw(c11.5,7) 12.5,7 12.5,8.375
  lines w0.025: -12.5,-8.342 -12.5,-10 ccw(c-10,-10) -10,-12.5 -8.342,-12.5 ; -8.342,-12.5 -7.729,-12.5 8.342,-12.5 10,-12.5 ccw(c10,-10) 12.5,-10 12.5,-8.342 ; -6.656,11.012 cw(c-6.5,12) -7.5,12 ; -6.5,11 ccw(c-6.5,12) -5.5,12 -5.5,12.25 cw(c-5.25,12.25) -5.25,12.5 10,12.5 cw(c10,10) 12.5,10 12.5,8.342 ; -7.5,12 -7.5,12.25 ccw(c-7.75,12.25) -7.75,12.5 -10,12.5 ccw(c-10,10) -12.5,10 -12.5,7.5 -10,7.5 ccw(c-10,10) -7.5,10 -7.5,12
Component Keepout Dwg:
  lines w0.01: -12.5,-7 cw(c-11.5,-7) -11.5,-6 -9.1,-6 ccw(c-9.1,-5) -8.1,-5 -8.1,-4.3 ccw(c-9.1,-4.3) -9.1,-3.3 -13.2,-3.3 cw(c-13.2,-2.5) -14,-2.5 -14,2.5 cw(c-13.2,2.5) -13.2,3.3 -9.1,3.3 ccw(c-9.1,4.3) -8.1,4.3 -8.1,5 ccw(c-9.1,5) -9.1,6 -11.5,6 cw(c-11.5,7) -12.5,7 ; 12.5,-7 ccw(c11.5,-7) 11.5,-6 9.1,-6 cw(c9.1,-5) 8.1,-5 8.1,-4.3 cw(c9.1,-4.3) 9.1,-3.3 13.2,-3.3 ccw(c13.2,-2.5) 14,-2.5 14,2.5 ccw(c13.2,2.5) 13.2,3.3 9.1,3.3 cw(c9.1,4.3) 8.1,4.3 8.1,5 cw(c9.1,5) 9.1,6 11.5,6 ccw(c11.5,7) 12.5,7
  lines w0.025: -12.5,-7.018 -12.5,-10 ccw(c-10,-10) -10,-12.5 -7.729,-12.5 10,-12.5 ccw(c10,-10) 12.5,-10 12.5,-6.974 ; -12.5,7.003 -12.5,10 cw(c-10,10) -10,12.5 -7.729,12.5 ; -7.75,12.5 cw(c-7.75,12.25) -7.5,12.25 -7.5,12 ccw(c-6.5,12) -6.656,11.012 ; -6.65,11.015 cw(c-10,10) -7,8.197 -7,-8.197 cw(c-10,-10) -6.646,-11 6.646,-11 cw(c10,-10) 7,-8.197 7,8.197 cw(c10,10) 6.646,11 -6.5,11 ccw(c-6.5,12) -5.5,12 -5.5,12.25 cw(c-5.25,12.25) -5.25,12.5 10,12.5 cw(c10,10) 12.5,10 12.5,6.966
  text "Component Keepout" at 37.726,-10.497 h1.7
Routing Keepout Dwg:
  lines w0.01: -13.6,-2.468 ccw(c-13.2,-2.468) -13.2,-2.868 -9.3,-2.868 -9.3,2.874 -13.198,2.874 ; -13.6,-2.466 -13.6,2.477 ; -13.6,2.474 cw(c-13.2,2.474) -13.2,2.874 ; -12.5,-8.342 -12.5,-6.974 ; -12.5,-7 cw(c-11.5,-7) -11.5,-6 -9.1,-6 ccw(c-9.1,-5) -8.1,-5 -8.1,-4.3 ccw(c-9.1,-4.3) -9.1,-3.3 -13.2,-3.3 cw(c-13.2,-2.5) -14,-2.5 -14,2.5 cw(c-13.2,2.5) -13.2,3.3 -9.1,3.3 ccw(c-9.1,4.3) -8.1,4.3 -8.1,5 ccw(c-9.1,5) -9.1,6 -11.5,6 cw(c-11.5,7) -12.5,7 ; -12.5,6.974 -12.5,8.342 ; 12.5,-8.342 12.5,-6.974 ; 12.5,-7 ccw(c11.5,-7) 11.5,-6 9.1,-6 cw(c9.1,-5) 8.1,-5 8.1,-4.3 cw(c9.1,-4.3) 9.1,-3.3 13.2,-3.3 ccw(c13.2,-2.5) 14,-2.5 14,2.5 ccw(c13.2,2.5) 13.2,3.3 9.1,3.3 cw(c9.1,4.3) 8.1,4.3 8.1,5 cw(c9.1,5) 9.1,6 11.5,6 ccw(c11.5,7) 12.5,7 ; 12.5,6.966 12.5,8.342
  lines w0.025: -12.5,-8.342 -12.5,-10 ccw(c-10,-10) -10,-12.5 -8.342,-12.5 -7.729,-12.5 8.342,-12.5 10,-12.5 ccw(c10,-10) 12.5,-10 12.5,-8.342 ; -6.656,11.012 cw(c-6.5,12) -7.5,12 -7.5,12.25 ccw(c-7.75,12.25) -7.75,12.5 -8.342,12.5 ; -6.5,11 ccw(c-6.5,12) -5.5,12 -5.5,12.25 cw(c-5.25,12.25) -5.25,12.5 8.342,12.5 10,12.5 cw(c10,10) 12.5,10 12.5,8.342 ; -8.342,12.5 cw(c-10,10) -12.5,8.342 -12.5,10 cw(c-10,10) -10,12.5 -8.342,12.5
  text "Routing Keepout" at 37.8,-11.875 h1.7
Symbol - GND:
  lines w0.1: 6.607,-9.374 cw(c10,-10) 6.944,-8.399 ccw(c7.72,-8.206) 7.653,-9.003 ; 6.612,-9.352 ccw(c7.052,-9.446) 7.492,-9.539 cw(c10,-10) 7.643,-9.027 ; 9.003,-7.653 ccw(c8.206,-7.72) 8.399,-6.944 cw(c10,-10) 9.374,-6.607 ; 9.027,-7.643 cw(c10,-10) 9.539,-7.492 ccw(c9.446,-7.052) 9.352,-6.612
  lines w0.33: 6.94,-8.685 ccw(c7.302,-8.759) 7.445,-9.1 ; 8.685,-6.94 cw(c8.759,-7.302) 9.1,-7.445
  lines w1: 7.055,-9.43 cw(c10,-10) 7.086,-9.285 ; 9.285,-7.086 cw(c10,-10) 9.43,-7.055
  text "-" at 8.146,-8.643 h3.5 r45
Symbol - JD_PWR:
  lines w0.1: -9.374,-6.607 cw(c-10,-10) -8.399,-6.944 ccw(c-8.206,-7.72) -9.003,-7.653 ; -9.352,-6.612 ccw(c-9.446,-7.052) -9.539,-7.492 cw(c-10,-10) -9.027,-7.643 ; -7.653,-9.003 ccw(c-7.72,-8.206) -6.944,-8.399 cw(c-10,-10) -6.607,-9.374 ; -7.643,-9.027 cw(c-10,-10) -7.492,-9.539 ccw(c-7.052,-9.446) -6.612,-9.352
  lines w0.33: -9.1,-7.445 cw(c-8.759,-7.302) -8.685,-6.94 ; -7.445,-9.1 ccw(c-7.302,-8.759) -6.94,-8.685
  lines w1: -9.43,-7.055 cw(c-10,-10) -9.285,-7.086 ; -7.086,-9.285 cw(c-10,-10) -7.055,-9.43
  text "+" at -7.95,-8.67 h2.8 r315
Symbol - JD_DATA:
  lines w0.1: -9.374,6.607 ccw(c-10,10) -8.399,6.944 cw(c-8.206,7.72) -9.003,7.653 ; -9.352,6.612 cw(c-9.446,7.052) -9.539,7.492 ccw(c-10,10) -9.027,7.643 ; -7.653,9.003 cw(c-7.72,8.206) -6.944,8.399 ccw(c-10,10) -6.607,9.374 ; -7.643,9.027 ccw(c-10,10) -7.492,9.539 cw(c-7.052,9.446) -6.612,9.352
  lines w0.2: -8.352,7.884 -8.366,7.484 ; -7.973,7.408 -8.366,7.484 ; -7.883,8.345 -7.484,8.366 ; -7.401,7.975 -7.484,8.366 ; -8.366,7.484 ccw(c-10,10) -7.484,8.366
  lines w0.33: -9.1,7.445 ccw(c-8.759,7.302) -8.685,6.94 ; -7.445,9.1 cw(c-7.302,8.759) -6.94,8.685
  lines w1: -9.43,7.055 ccw(c-10,10) -9.285,7.086 ; -7.086,9.285 ccw(c-10,10) -7.055,9.43
Silhouette:
  circle w0.25: c8.7,-1.27 r0.12
  circle w0.25: c8.7,1.27 r0.12
  circle w0.25: c8.7,0 r0.12
  circle w0.25: c-8.7,1.27 r0.12
  circle w0.25: c-8.7,0 r0.12
  circle w0.25: c-8.7,-1.27 r0.12
  pour cut-out: 11,-2.85 ccw(c11,-2.5) 11,-2.15 10.3,-2.15 ccw(c10.3,-2.5) 10.3,-2.85
  pour cut-out: -10,8.485 ccw(c-10,10) -8.485,10 ccw(c-10,10) -10,11.515 ccw(c-10,10) -11.515,10 ccw(c-10,10)
  pour cut-out: 10,8.485 ccw(c10,10) 11.515,10 ccw(c10,10) 10,11.515 ccw(c10,10) 8.485,10 ccw(c10,10)
  pour cut-out: 9.016,-1.72 cw(c8.7,-1.27) 9.016,-0.82 12.519,-0.82 cw(c12.519,-1.101) 12.8,-1.101 12.8,-1.439 cw(c12.519,-1.439) 12.519,-1.72
  pour cut-out: 9.016,-0.45 cw(c8.7,0) 9.016,0.45 13.019,0.45 cw(c13.019,0.169) 13.3,0.169 13.3,-0.169 cw(c13.019,-0.169) 13.019,-0.45
  pour cut-out: 9.016,0.82 cw(c8.7,1.27) 9.016,1.72 13.019,1.72 cw(c13.019,1.439) 13.3,1.439 13.3,1.101 cw(c13.019,1.101) 13.019,0.82
  pour cut-out: 11,2.85 cw(c11,2.5) 11,2.15 10.3,2.15 cw(c10.3,2.5) 10.3,2.85
  pour cut-out: -11,-2.85 cw(c-11,-2.5) -11,-2.15 -10.3,-2.15 cw(c-10.3,-2.5) -10.3,-2.85
  pour cut-out: -11,2.85 ccw(c-11,2.5) -11,2.15 -10.3,2.15 ccw(c-10.3,2.5) -10.3,2.85
  pour cut-out: -9.016,1.72 cw(c-8.7,1.27) -9.016,0.82 -12.519,0.82 cw(c-12.519,1.101) -12.8,1.101 -12.8,1.439 cw(c-12.519,1.439) -12.519,1.72
  pour cut-out: -9.016,0.45 cw(c-8.7,0) -9.016,-0.45 -13.019,-0.45 cw(c-13.019,-0.169) -13.3,-0.169 -13.3,0.169 cw(c-13.019,0.169) -13.019,0.45
  pour cut-out: -9.016,-0.82 cw(c-8.7,-1.27) -9.016,-1.72 -13.019,-1.72 cw(c-13.019,-1.439) -13.3,-1.439 -13.3,-1.101 cw(c-13.019,-1.101) -13.019,-0.82
  pour cut-out: -10,-11.515 ccw(c-10,-10) -8.485,-10 ccw(c-10,-10) -10,-8.485 ccw(c-10,-10) -11.515,-10 ccw(c-10,-10)
  pour cut-out: 10,-11.515 ccw(c10,-10) 11.515,-10 ccw(c10,-10) 10,-8.485 ccw(c10,-10) 8.485,-10 ccw(c10,-10)
Construction:
  circle w0.025: c10,-10 r1.515
  circle w0.025: c-10,-10 r1.515
  circle w0.025: c-10,10 r1.515
  circle w0.025: c10,10 r1.515
  lines w0.01: -13.3,-1.439 ccw(c-13.019,-1.439) -13.019,-1.72 -9.016,-1.72 ccw(c-8.7,-1.27) -9.016,-0.82 -13.019,-0.82 ccw(c-13.019,-1.101) -13.3,-1.101 -13.3,-1.439 ; -13.3,-0.169 ccw(c-13.019,-0.169) -13.019,-0.45 -9.016,-0.45 ccw(c-8.7,0) -9.016,0.45 -13.019,0.45 ccw(c-13.019,0.169) -13.3,0.169 -13.3,-0.169 ; -12.8,1.101 ccw(c-12.519,1.101) -12.519,0.82 -9.016,0.82 ccw(c-8.7,1.27) -9.016,1.72 -12.519,1.72 ccw(c-12.519,1.439) -12.8,1.439 -12.8,1.101 ; -11,-2.85 cw(c-11,-2.5) -11,-2.15 -10.3,-2.15 cw(c-10.3,-2.5) -10.3,-2.85 -11,-2.85 ; -11,2.15 cw(c-11,2.5) -11,2.85 -10.3,2.85 cw(c-10.3,2.5) -10.3,2.15 -11,2.15 ; 9.016,-1.72 cw(c8.7,-1.27) 9.016,-0.82 12.519,-0.82 cw(c12.519,-1.101) 12.8,-1.101 12.8,-1.439 cw(c12.519,-1.439) 12.519,-1.72 9.016,-1.72 ; 9.016,-0.45 cw(c8.7,0) 9.016,0.45 13.019,0.45 cw(c13.019,0.169) 13.3,0.169 13.3,-0.169 cw(c13.019,-0.169) 13.019,-0.45 9.016,-0.45 ; 9.016,0.82 cw(c8.7,1.27) 9.016,1.72 13.019,1.72 cw(c13.019,1.439) 13.3,1.439 13.3,1.101 cw(c13.019,1.101) 13.019,0.82 9.016,0.82 ; 10.3,-2.85 cw(c10.3,-2.5) 10.3,-2.15 11,-2.15 cw(c11,-2.5) 11,-2.85 10.3,-2.85 ; 10.3,2.15 cw(c10.3,2.5) 10.3,2.85 11,2.85 cw(c11,2.5) 11,2.15 10.3,2.15
  lines w0.1: -12.5,-7 cw(c-11.5,-7) -11.5,-6 -9.1,-6 ccw(c-9.1,-5) -8.1,-5 -8.1,-4.3 ccw(c-9.1,-4.3) -9.1,-3.3 ; -12.5,-6.97 -12.5,-10 ccw(c-10,-10) -10,-12.5 10,-12.5 ccw(c10,-10) 12.5,-10 12.5,-7 ccw(c11.5,-7) 11.5,-6 9.1,-6 cw(c9.1,-5) 8.1,-5 8.1,-4.3 cw(c9.1,-4.3) 9.1,-3.3 13.2,-3.3 ; -9.1,-3.3 -13.2,-3.3 cw(c-13.2,-2.5) -14,-2.5 -14,2.5 cw(c-13.2,2.5) -13.2,3.3 -9.1,3.3 ; -9.098,3.3 ccw(c-9.098,4.3) -8.098,4.3 ; -8.1,4.3 -8.1,5 ccw(c-9.1,5) -9.1,6 -11.5,6 cw(c-11.5,7) -12.5,7 -12.5,10 cw(c-10,10) -10,12.5 -7.75,12.5 cw(c-7.75,12.25) -7.5,12.25 -7.5,12 ccw(c-6.5,12) -5.5,12 -5.5,12.25 cw(c-5.25,12.25) -5.25,12.5 10,12.5 cw(c10,10) 12.5,10 12.5,7 cw(c11.5,7) 11.5,6 9.1,6 ccw(c9.1,5) 8.1,5 8.1,4.3 ; 8.098,4.3 ccw(c9.098,4.3) 9.098,3.3 ; 9.1,3.3 13.2,3.3 cw(c13.2,2.5) 14,2.5 14,-2.5 cw(c13.2,-2.5) 13.2,-3.3

## Text inside footprints (layer, text, board x,y; h text height)
EC1: Mechanical 9 "Jacdac / cable connector  / body" at -18.158,-4.821 h1.7 r90
EC2: Mechanical 9 "Jacdac / cable connector  / body" at 18.158,4.821 h1.7 r270